# Altium PCB PCB1.pcbdoc
Units mil, origin at the board's own origin, x right, y up, seen from the top; angles counter-clockwise.
Board outline 3149.6 x 3149.6 mil, 2 copper layers (Top Layer, Bottom Layer), stack 62.2 mil thick; 28 components, 20 nets, 132 pads, 1 vias.
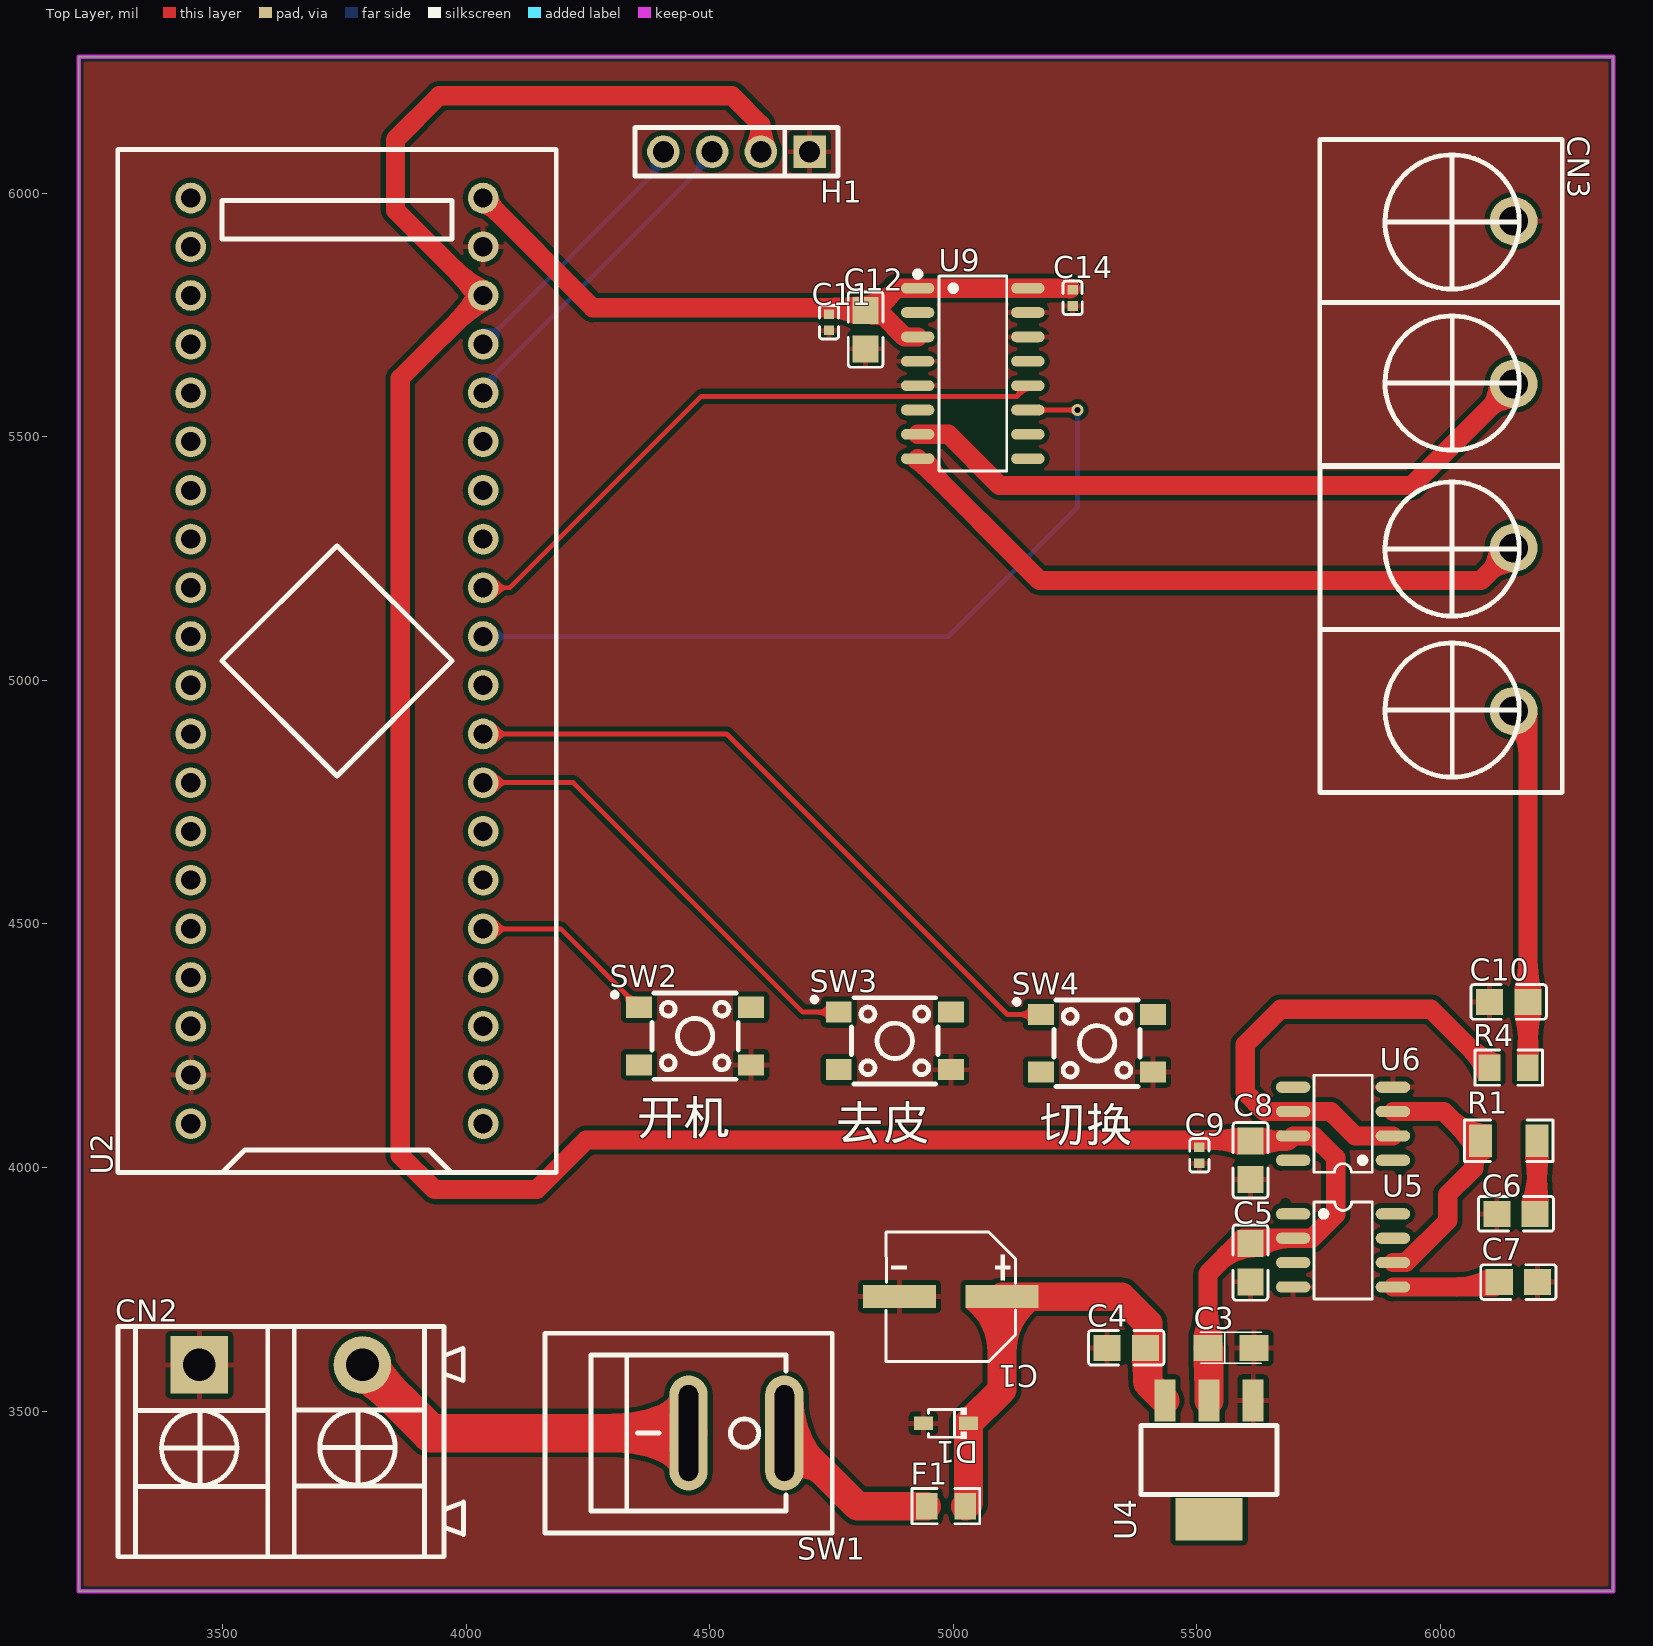
[diagram p0: Top Layer view]
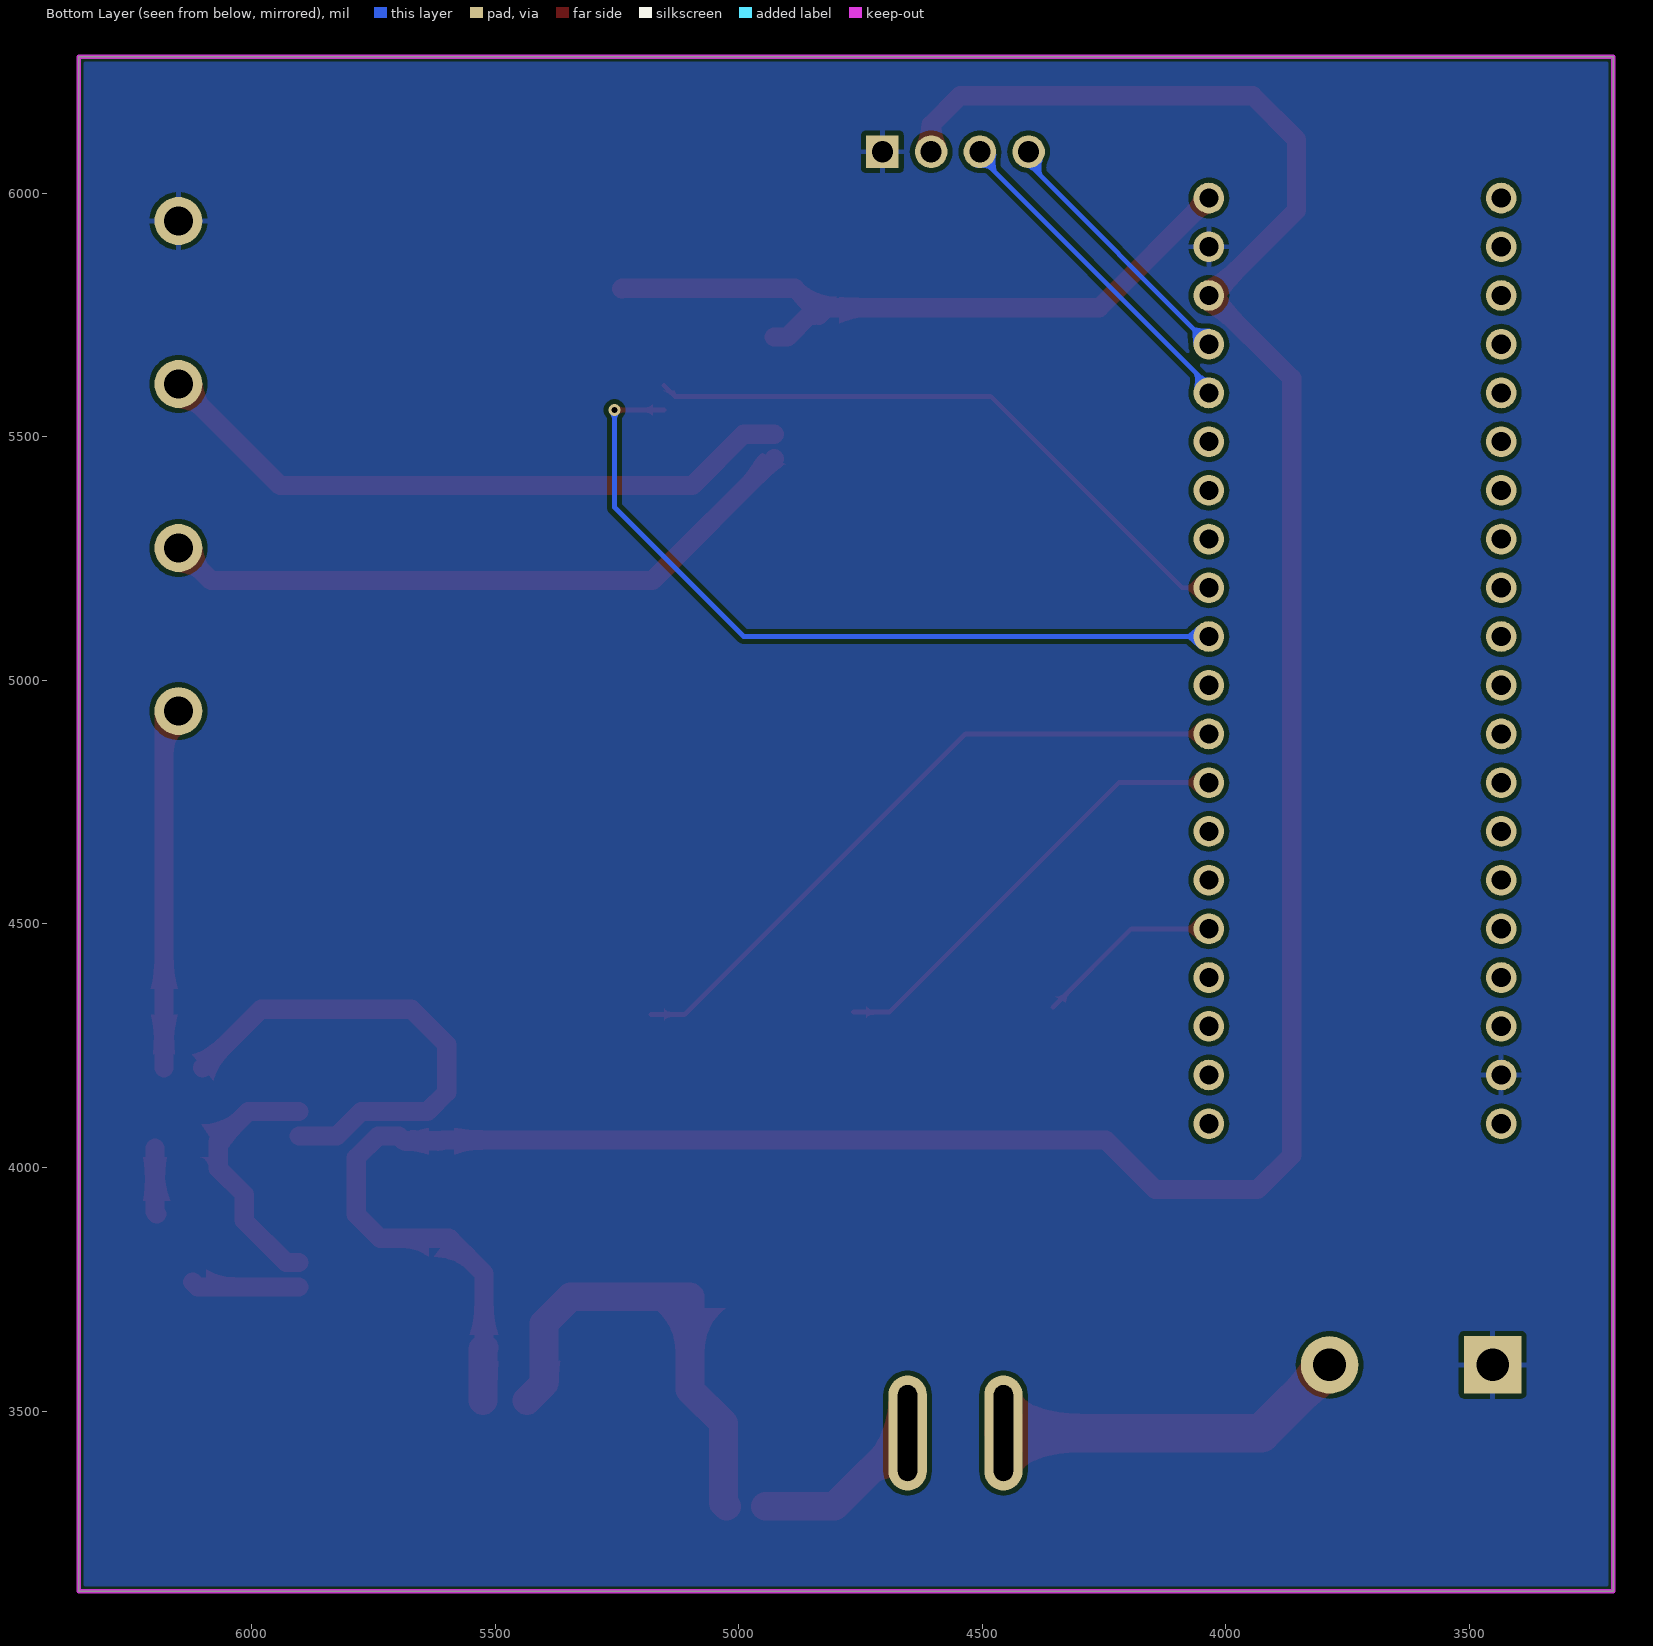
[diagram p1: Bottom Layer view, seen from below]

## Layer stack, top to bottom
Top Solder Mask Layer: solder mask 0.4, Dk 3.3
Top Layer: signal copper 1.4
Dielectric1: surface 59.4, FR4, Dk 4.5
Bottom Layer: signal copper 1.4
Bottom Solder Mask Layer: solder mask 0.4, Dk 3.3

## Board outline
3205,6280 3205,3130.4 6354.6,3130.4 6354.6,6280

## Design rules (kind name [scope] priority, off if disabled: settings)
BoardOutlineClearance copperThickness1oz_1 [All] p1: gap=10 ignorepadtopadclearanceinfootprint=FALSE except(0: Arc-SplitContinuation Track-SplitContinuation SMDPad-SplitContinuation THPad-SplitContinuation Via-SplitContinuation Fill-SplitContinuation Poly-SplitContinuation Region-SplitContinuation Text-SplitContinuation)
BoardOutlineClearance copperThickness2oz_1 [All] p2: gap=10 ignorepadtopadclearanceinfootprint=FALSE except(0: Arc-SplitContinuation Track-SplitContinuation SMDPad-SplitContinuation THPad-SplitContinuation Via-SplitContinuation Fill-SplitContinuation Poly-SplitContinuation Region-SplitContinuation Text-SplitContinuation)
BoardOutlineClearance otherClearance_1 [All] p3: gap=10 ignorepadtopadclearanceinfootprint=FALSE except(0: Arc-SplitContinuation Track-SplitContinuation SMDPad-SplitContinuation THPad-SplitContinuation Via-SplitContinuation Fill-SplitContinuation Poly-SplitContinuation Region-SplitContinuation Text-SplitContinuation)
Clearance copperThickness1oz [All] p1: gap=7 ignorepadtopadclearanceinfootprint=FALSE
Clearance copperThickness2oz [All] p2: gap=7 ignorepadtopadclearanceinfootprint=FALSE
Clearance otherClearance [All] p3: gap=7 ignorepadtopadclearanceinfootprint=FALSE
DiffPairsRouting differentialPair [All] p1: maxlimit=6 minlimit=6 mostfreqgap=6 toplayer_minwidth=5 toplayer_maxwidth=100 toplayer_prefwidth=10 bottomlayer_minwidth=5 bottomlayer_maxwidth=100 bottomlayer_prefwidth=10 maxuncoupledlength=10
PasteMaskExpansion pasteMaskExpansion [All] p1: expansion=0
PlaneConnect innerPlane [All] p1: planeconnectstyle=Relief reliefexpansion=20 reliefentries=4 reliefconductorwidth=10 reliefairgap=10
PolygonConnect copperRegion [All] p1: connectstyle=Relief reliefconductorwidth=10 reliefentries=4 polygonreliefangle="90 Angle" airgapwidth=10
RoutingVias viaSize [All] p1: holewidth=12.01 width=12.01 viastyle="Through Hole" minholewidth=11.81 minwidth=11.81 maxholewidth=248.03 maxwidth=248.03
SolderMaskExpansion solderMaskExpansion_1 [IsVia] p1: expansion=-1000 istentingtop=FALSE useseparateexpansions=TRUE expansionbottom=-1000 istentingbottom=FALSE
SolderMaskExpansion solderMaskExpansion [All] p2: expansion=2 istentingtop=FALSE useseparateexpansions=TRUE expansionbottom=2 istentingbottom=FALSE
Width copperThickness1oz_2 [All] p1: maxlimit=100 minlimit=5 preferedwidth=10
Width copperThickness2oz_2 [All] p2: maxlimit=100 minlimit=8 preferedwidth=10
27 further rules are at their usual default settings.

## Components (designator, comment, footprint, x,y, rotation, side; value= is the part's Value field where it differs from the comment)
C1 "100uF" CAP-SMD_BD6.3-L6.6-W6.6-FD-1 4995,3735 r180 top
C3 "22uF" CASE-A_3216 5570,3630 r0 top
C4 "10uF" C0805 5355,3630 r0 top
C5 "10uF" C0805 5610,3805 r90 top
C6 "10uF" C0805 6155,3905 r0 top
C7 "1uF" C0805 6160,3765 r180 top
C8 "10uF" C0805 5610,4015 r90 top
C9 "100nF" C0402 5505,4025 r90 top
C10 "10uF" C0805 6140,4340 r0 top
C11 "100nF" C0402 4745,5735 r90 top
C12 "10uF" C0805 4820,5720 r90 top
C14 "100nF" C0402 5245,5785 r90 top
CN2 "KF8500-2p-8.4MM" CONN-TH_KF8500-2P-8.4MM 3620,3595 r0 top
CN3 "KF8500-4P-8.4mm" CONN-TH_KF8500-4P-8.4MM 6150,5440 r270 top
D1 "1N5819WS" SOD-323_L1.8-W1.3-LS2.5-RD 4985,3475 r180 top
F1 "SMD0805-100-12" R0805 4985,3305 r0 top
H1 "2.54-1*4P母" HDR-TH_4P-P2.54-V-F 4555,6085 r180 top
R1 "1Ω" R1206 6140,4055 r180 top
R4 "10Ω" R0805 6140,4205 r0 top
SW1 "RS601HL-1010011BB" SW-TH_RS601HL-1010011BB 4555,3455 r180 top
SW2 "TS1603-TZ60HBM" SW-SMD_4P-L4.5-W4.5-P3.00-LS6.8-1 4470,4270 r0 top
SW3 "TS1603-TZ60HBM" SW-SMD_4P-L4.5-W4.5-P3.00-LS6.8-1 4880,4260 r0 top
SW4 "TS1603-TZ60HBM" SW-SMD_4P-L4.5-W4.5-P3.00-LS6.8-1 5295,4255 r0 top
U2 "LCKFB-DKX-STM32F103C8T6" CONN-TH_L53.3-W22.9_STM32F103C8T6-CARD 3735,5040 r90 top
U4 "AMS1117-5.0" SOT-223_L6.7-W3.5-P2.30-BR 5525,3400 r90 top
U5 "REF5040AIDR" SOIC-8_L4.9-W3.9-P1.27-LS6.0-BL 5800,3830 r270 top
U6 "OPA376AIDR" SOIC-8_L4.9-W3.9-P1.27-LS6.0-BL 5800,4090 r90 top
U9 "HX711" SOP-16_L10.0-W3.9-P1.27-LS6.0-BL 5040,5630 r270 top

## Footprints (in the part's own frame and the unit in brackets; to place one, negate y for a bottom-side part, rotate by r counter-clockwise, add the part's x,y. Pads: shape width x height; smd on the part's side, far side on the other; paste and mask are expansions set on the pad)
C0402 [mil]
  rect 19.7x21.3 smd: 1(-16.5,0) 2(16.5,0)
  silkscreen extent -34,-20 34,20
C0805 [mil]
  rect 55.5x53.1 smd paste-3937 mask+2: 1(-39.4,0) 2(39.4,0)
  silkscreen extent -77,-36 77,36
CAP-SMD_BD6.3-L6.6-W6.6-FD-1 [mil]
  rect 149.6x47.2 smd: 1(-105.1,0) 2(105.1,0)
  silkscreen extent -133,-133 133,133
CASE-A_3216 [mil]
  rect 59.1x53.5 smd: 1(-47.2,0) 2(47.2,0)
  silkscreen extent -63,-32 63,32
CONN-TH_KF8500-2P-8.4MM [mil]
  rect 118.1x118.1 hole 66.9: 1(-167.3,0)
  round 118.1 hole 66.9: 2(167.3,0)
  silkscreen extent -335,-394 375,79
CONN-TH_KF8500-4P-8.4MM [mil]
  round 98.4 hole 59.1: 1(-502.9,0) 2(-168.3,0) 3(168.3,0) 4(502.9,0)
  silkscreen extent -670,-398 670,100
CONN-TH_L53.3-W22.9_STM32F103C8T6-CARD [mil]
  round 63 hole 39.4: 1(-950,-300) 2(-850,-300) 3(-750,-300) 4(-650,-300) 5(-550,-300) 6(-450,-300) 7(-350,-300) 8(-250,-300) 9(-150,-300) 10(-50,-300) 11(50,-300) 12(150,-300) 13(250,-300) 14(350,-300) 15(450,-300) 16(550,-300) 17(650,-300) 18(750,-300) 19(850,-300) 20(950,-300) 21(950,300) 22(850,300) 23(750,300) 24(650,300) 25(550,300) 26(450,300) 27(350,300) 28(250,300) 29(150,300) 30(50,300) 31(-50,300) 32(-150,300) 33(-250,300) 34(-350,300) 35(-450,300) 36(-550,300) 37(-650,300) 38(-750,300) 39(-850,300) 40(-950,300)
  silkscreen extent -1050,-450 1050,450
HDR-TH_4P-P2.54-V-F [mil]
  rect 66.9x66.9 hole 43.3: 1(-150,0)
  round 66.9 hole 43.3: 2(-50,0) 3(50,0) 4(150,0)
  silkscreen extent -208,-50 208,50
R0805 [mil]
  rect 44.6x54.2 smd paste-3937 mask+2: 1(-39.4,0) 2(39.4,0)
  silkscreen extent -69,-36 69,36
R1206 [mil]
  rect 47.5x67 smd paste-3937 mask+2: 1(-58.2,0) 2(58.2,0)
  silkscreen extent -91,-43 91,43
SOD-323_L1.8-W1.3-LS2.5-RD [mil]
  rect 39.4x27.6 smd: 1(-46.2,0) 2(46.2,0)
  silkscreen extent -43,-32 36,32
SOIC-8_L4.9-W3.9-P1.27-LS6.0-BL [mil]
  oval 23.1x70.9 smd paste+0 mask+2: 1(-75,-102.4) 2(-25,-102.4) 3(25,-102.4) 4(75,-102.4) 5(75,102.4) 6(25,102.4) 7(-25,102.4) 8(-75,102.4)
  silkscreen extent -100,-60 100,60
SOP-16_L10.0-W3.9-P1.27-LS6.0-BL [mil]
  oval 22x68.7 smd: 1(-175,-113.1) 2(-125,-113.1) 3(-75,-113.1) 4(-25,-113.1) 5(25,-113.1) 6(75,-113.1) 7(125,-113.1) 8(175,-113.1) 9(175,113.1) 10(125,113.1) 11(75,113.1) 12(25,113.1) 13(-25,113.1) 14(-75,113.1) 15(-125,113.1) 16(-175,113.1)
  silkscreen extent -210,-119 200,70
SOT-223_L6.7-W3.5-P2.30-BR [mil]
  rect 86.6x43.3 smd: 1(122,-90.6) 2(122,0) 3(122,90.6)
  rect 86.6x137.8 smd: 4(-122,0)
  silkscreen extent -71,-140 71,140
SW-SMD_4P-L4.5-W4.5-P3.00-LS6.8-1 [mil]
  rect 53.1x43.3 smd: 1(-115.1,59.1) 2(115.1,59.1) 3(-115.1,-59.1) 4(115.1,-59.1)
  silkscreen extent -170,-89 89,90
SW-TH_RS601HL-1010011BB [mil]
  oval 78.7x236.2 hole 39.4 slot 196.8 at 90 deg paste-99999 mask+2: 1(-98.4,0) 2(98.4,0)
  silkscreen extent -197,-205 393,205

## Via types
v1: diameter 24, hole 12, Top Layer to Bottom Layer, 1 vias

## Nets (pads, with @x,y where several pads share a name; then routed paths per layer and width w, separated by ;. In a path a pad name is that pad's centre, name@x,y a point inside that pad or via, vN(x,y) a via of type N, cw(c..) or ccw(c..) an arc to the next point about the centre after c; other vN are vias at no path point)
3.3V: C11.2 C12.2 C14.2 U2.20 U9.1 U9.3 U9.16 | length 1426
  Top Layer w39.4: U2.20 4260,5765 4819.4,5765 C12.2@4835,5749.4 ; U9.3 4900,5705 4855.6,5749.4 4846.1,5749.4 4846.1,5766.1 4885,5805 U9.1 U9.16 5239,5805 C14.2@5240,5804
$1N11: F1.1 SW1.1 | length 354.3
  Top Layer w59.1: SW1.1 4803.4,3305 F1.1
$1N40: C6.2 R1.1 | length 136.6
  Top Layer w39.4: C6.2 6198.2,3908.8 R1.1@6198.2,4040
$1N42: C7.2 U5.5 | length 222.3
  Top Layer w39.4: U5.5 6110.6,3755 C7.2
$1N49: R1.2 U5.6 U6.3 | length 523.9
  Top Layer w39.4: U5.6 5928.9,3805 6015,3891.1 6015,3945 6068.1,3998.1 6068.1,4053.7 6006.8,4115 U6.3
+5V: C3.1 C5.2 C8.2 C9.2 H1.2 U2.18 U4.2 U5.2 U6.7 | length 5800
  Top Layer w39.4: H1.2 4605,6140.7 4545.7,6200 3945,6200 3855,6110 3855,5965 4030,5790 U2.18 3865,5620 3865,4025 3935,3955 4145,3955 4246.5,4056.5 5607.8,4056.5 C8.2 5687,4054.4 U6.7 5740,4065 5785,4020 5785,3903.5 5736.5,3855 U5.2 ; C3.1 5522.8,3782.8 5595,3855 U5.2@5691.8,3855
  Top Layer w59.1: C3.1 5525,3627.8 U4.2
+9V: CN2.2 SW1.2 | length 727.3
  Top Layer w78.7: CN2.2 3927.3,3455 SW1.2
DOUT: U2.12 U9.12 | length 1290
  Top Layer w10: U2.12 4090,5190 4483,5583 5131.1,5583 U9.12
GND: C1.2 C3.2 C4.1 C5.1 C6.1 C7.1 C8.1 C9.1 C10.1 C11.1 C12.1 C14.1 CN2.1 CN3.1 D1.2 H1.1 SW2.4 SW3.4 SW4.4 U2.19 U2.39 U4.1 U5.4 U6.4 U9.4 U9.5 U9.14 U9.15
KEY1: SW2.1 U2.5 | length 386.5
  Top Layer w10: U2.5 4193.9,4490 SW2.1
KEY2: SW3.1 U2.8 | length 925
  Top Layer w10: U2.8 4220,4790 4690.9,4319.1 SW3.1
KEY3: SW4.1 U2.9 | length 1383.4
  Top Layer w10: U2.9 4535,4890 5110.9,4314.1 SW4.1
SCK: U2.11 U9.11 | length 1631.7
  Top Layer w10: U9.11 v1(5255,5555)
  Bottom Layer w10: U2.11 4990,5090 5255,5355 v1(5255,5555)
SCL: H1.3 U2.16 | length 689.7
  Bottom Layer w10: U2.16 4035,5605 4505,6075 H1.3
SDA: H1.4 U2.17 | length 548.3
  Bottom Layer w10: U2.17 4405,6060 H1.4
V+: CN3.3 U9.8 | length 1354.3
  Top Layer w39.4: U9.8 5176.9,5205 6083.3,5205 CN3.3
V-: CN3.2 U9.7 | length 1352.9
  Top Layer w39.4: U9.7 4990,5505 5095,5400 5941.7,5400 CN3.2
VBAT: C1.1 C4.2 D1.1 F1.2 U4.3 | length 956.2
  Top Layer w59.1: F1.2 5031.2,3311.8 D1.1 5100.1,3544 C1.1 5345,3735 5399.4,3680.6 5399.4,3635 5399.4,3557.1 U4.3
VO: R4.1 U6.2 U6.6 | length 1019.3
  Top Layer w39.4: U6.2 5825,4065 5775,4115 U6.6 5638.7,4115 5599.4,4154.4 5599.4,4252.8 5671.5,4325 5980.6,4325 R4.1
VOUT: C10.2 CN3.4 R4.2 | length 744.3
  Top Layer w39.4: CN3.4 6179.4,4907.7 C10.2 R4.2
pads on no net: SW2.2 SW2.3 SW3.2 SW3.3 SW4.2 SW4.3 U2.1 U2.2 U2.3 U2.4 U2.6 U2.7 U2.10 U2.13 U2.14 U2.15 U2.21 U2.22 U2.23 U2.24 U2.25 U2.26 U2.27 U2.28 U2.29 U2.30 U2.31 U2.32 U2.33 U2.34 U2.35 U2.36 U2.37 U2.38 U2.40 U4.4 U5.1 U5.3 U5.7 U5.8 U6.1 U6.5 U6.8 U9.2 U9.6 U9.9 U9.10 U9.13

## Polygon pours and split planes (outlines as drawn)
GND on Top Layer "Top Layer-GND" (solid, remove dead copper, pour order 0): 3025,6525 3025,3045 6525,3045 6525,6525
GND on Bottom Layer "Bottom Layer-GND" (solid, remove dead copper, pour order 4): 3000,6695 3000,3000 6640,3000 6640,6695

## Keep-outs
Board Outline Layer:
  the board outline again, w10

## Silkscreen, mask and mechanical layers (free items; w line width, h text height)
Top Silkscreen Layer:
  text "开机" at 4350,4045 h120
  text "去皮" at 4760,4035 h120
  text "切换" at 5175,4030 h120